# EAGLE board bt_lokomotivy_v1 (EAGLE 6.3)
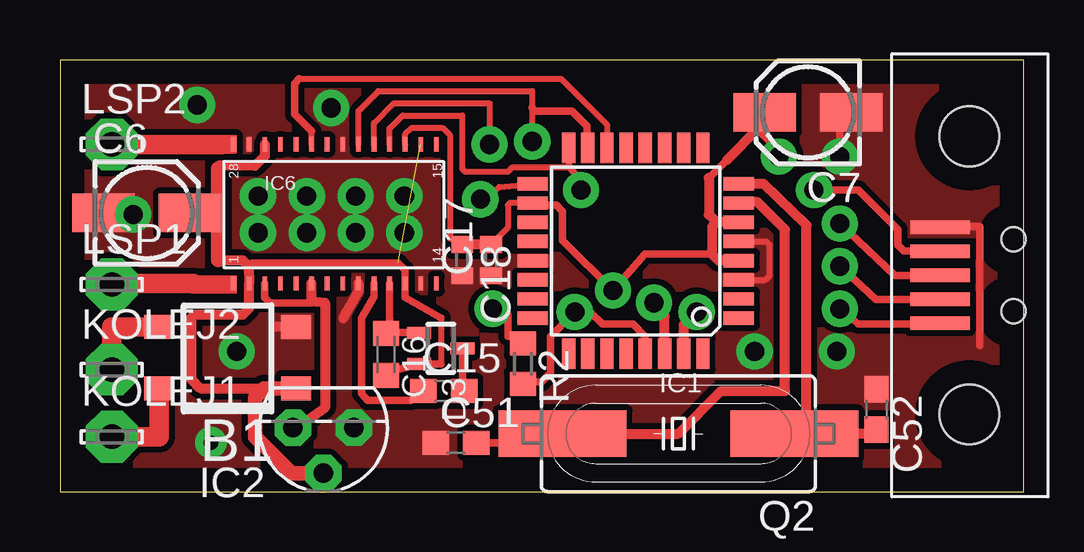
[diagram p0: board, top side]
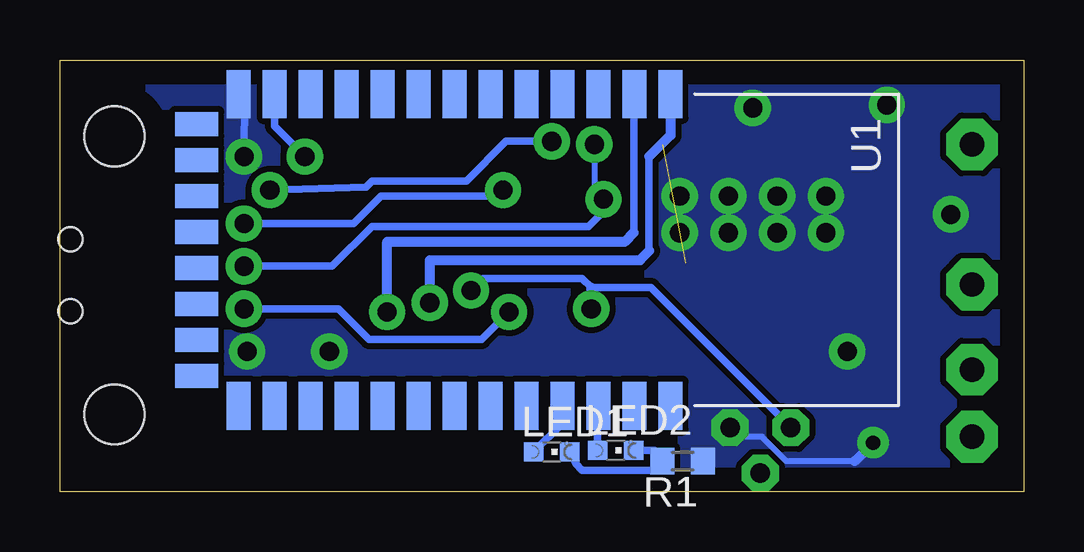
[diagram p1: board, bottom side, seen from below]

Size 40.18 x 18 mm. Coordinates in mm from the lower left corner, seen from the top.
Outline: 0,0 40.18,0 40.18,18 0,18 0,0
Copper layers (1*16): Top 0.035mm / dielectric 1.5mm / Bottom 0.035mm
Design rules "default *": minimum track width 10mil, minimum drill 24mil, track to track 10mil, track to pad 10mil, pad to pad 10mil, via to via 10mil, smd to smd 10mil, copper to edge 1mm, drill to drill 8mil, minimum pad ring 14mil, minimum via ring 14mil, stop-mask expansion 4mil, vias tented up to drill 0mil, thermal gap 10mil
Net classes: 0 default: width 0.15 mm, clearance 0.15 mm; 1 Power: width 0.25 mm, drill 0.381 mm, clearance 0.15 mm

## Footprints (pad centres in the part's own frame; a part is rotated, then mirrored left to right if it is on the bottom)
TO-269AA = smd 1 x 1.25: + -1.28,-2.855; - 1.28,-2.855; AC1 -1.28,2.855; AC2 1.28,2.855
153CLV-0405 = smd 2.6 x 1.6: + 1.8,0; - -1.8,0
C0603 = smd 1.1 x 1: 1 -0.85,0; 2 0.85,0
C0603K = smd 1.05 x 1.08: 1 -0.875,0; 2 0.875,0
C0402 = smd 0.7 x 0.9: 1 -0.65,0; 2 0.65,0
SOT323 = smd 0.5 x 1: 1 0,0.9; 2 -0.65,-0.9; 3 0.65,-0.9
TQFP32-08 = smd 1.27 x 0.559: 1 -4.293,2.8; 2 -4.293,2; 3 -4.293,1.2; 4 -4.293,0.4; 5 -4.293,-0.4; 6 -4.293,-1.2; 7 -4.293,-2; 8 -4.293,-2.8; 17 4.293,-2.8; 18 4.293,-2; 19 4.293,-1.2; 20 4.293,-0.4; 21 4.293,0.4; 22 4.293,1.2; 23 4.293,2; 24 4.293,2.8 | smd 0.559 x 1.27: 9 -2.8,-4.293; 10 -2,-4.293; 11 -1.2,-4.293; 12 -0.4,-4.293; 13 0.4,-4.293; 14 1.2,-4.293; 15 2,-4.293; 16 2.8,-4.293; 25 2.8,4.293; 26 2,4.293; 27 1.2,4.293; 28 0.4,4.293; 29 -0.4,4.293; 30 -1.2,4.293; 31 -2,4.293; 32 -2.8,4.293
TO92 = drill 0.813 pad 1.27 octagon: 1 -1.27,0; 2 0,1.905; 3 1.27,0
HTSSOP28 = smd 0.2 x 0.6: 1 -4.445,-3.26; 2 -3.795,-3.26; 3 -3.145,-3.26; 4 -2.495,-3.26; 5 -1.845,-3.26; 6 -1.195,-3.26; 7 -0.545,-3.26; 8 0.105,-3.26; 9 0.755,-3.26; 10 1.405,-3.26; 11 2.055,-3.26; 12 2.705,-3.26; 13 3.355,-3.26; 14 4.005,-3.26; 15 4.005,2.54; 16 3.355,2.54; 17 2.705,2.54; 18 2.055,2.54; 19 1.405,2.54; 20 0.755,2.54; 21 0.105,2.54; 22 -0.545,2.54; 23 -1.195,2.54; 24 -1.845,2.54; 25 -2.495,2.54; 26 -3.145,2.54; 27 -3.795,2.54; 28 -4.445,2.54
LSP10 = drill 1.016 pad 2.159 octagon: MP 0,0
CHIPLED_0603 = smd 0.8 x 0.8: A 0,-0.75; C 0,0.75
HC49UP = smd 5.334 x 1.93: 1 -4.826,0; 2 4.826,0
R0603 = smd 1 x 1.1: 1 -0.85,0; 2 0.85,0
BLUETOOTH_SMD = smd 2 x 1: 1 0,0; 2 0,-1.5; 3 0,-3; 4 0,-4.5; 5 0,-6; 6 0,-7.5; 7 0,-9; 8 0,-10.5; 9 0,-12; 10 0,-13.5; 11 0,-15; 12 0,-16.5; 13 0,-18; 22 13,-18; 23 13,-16.5; 24 13,-15; 25 13,-13.5; 26 13,-12; 27 13,-10.5; 28 13,-9; 29 13,-7.5; 30 13,-6; 31 13,-4.5; 32 13,-3; 33 13,-1.5; 34 13,0 | smd 1 x 1.8: 14 1.25,-19.75; 15 2.75,-19.75; 16 4.25,-19.75; 17 5.75,-19.75; 18 7.25,-19.75; 19 8.75,-19.75; 20 10.25,-19.75; 21 11.75,-19.75
SEI-5 = smd 0.56 x 2.477: P$1 -2,-1.04; P$2 -1,-1.04; P$3 0,-1.04; P$4 1,-1.04; P$5 2,-1.04 | hole 2.5: -5.8,0.187; 5.8,0.187 | hole 1: -1.5,2.03; 1.5,2.03

## Placement (x,y rotation side)
B1  RECTIFIER-S80  [TO-269AA]  6.99,5.59 90 top
C6  10u  [153CLV-0405]  3.62,11.62 0 top
C7  10u  [153CLV-0405]  31.18,15.81 180 top
C15  10n  [C0603]  16,4.19 0 top
C16  220n  [C0603K]  13.59,5.71 270 top
C17  100n  [C0402]  17.97,9.65 90 top
C18  100n  [C0402]  16.76,9.65 270 top
C51  20pF  [C0603]  16.51,2.03 0 top
C52  20pF  [C0603]  34.04,3.43 270 top
D3  [SOT323]  15.88,5.97 270 top
IC1  MEGA8-AI  [TQFP32-08]  24,10.03 180 top
IC2  HT7533-1 TO92  [TO92]  10.99,2.67 180 top
IC6  L6470  [HTSSOP28]  11.68,11.94 0 top
KOLEJ1  LSP10  [LSP10]  2.16,2.29 0 top
KOLEJ2  LSP10  [LSP10]  2.16,5.08 0 top
LED1  [CHIPLED_0603]  19.68,1.65 270 bottom
LED2  [CHIPLED_0603]  17.02,1.71 270 bottom
LSP1  LSP10  [LSP10]  2.16,8.64 0 top
LSP2  LSP10  [LSP10]  2.16,14.48 0 top
Q2  16MHz  [HC49UP]  25.78,2.41 180 top
R1  [R0603]  14.22,1.27 180 bottom
R2  4k7  [R0603]  19.3,5.33 270 top
U1  HC_05  [BLUETOOTH_SMD]  14.73,16.57 270 bottom
U$2  SEI-5  [SEI-5]  37.72,9.02 270 top

## Library data of the parts
B1 = rectifier
C6 C7 C51 C52 R1 R2 = rcl
C15-C18 = resistor
D3 = zetex; OC_FARNELL: unknown; OC_NEWARK: unknown
IC1 = atmel; MPN: ATMEGA8-16AU; OC_FARNELL: 9171371; OC_NEWARK: 73M8863
IC2 = national-semiconductor; MF: NATIONAL SEMICONDUCTOR; MPN: LM2936Z-3.0/NOPB; OC_FARNELL: 1312709; OC_NEWARK: 41K4531
IC6 = reprap
KOLEJ1 KOLEJ2 LSP1 LSP2 = solpad
LED1 LED2 = led
Q2 = crystal; OC_FARNELL: unknown; OC_NEWARK: unknown
U1 = SerialPortBluetooth
U$2 = con-samtec

## Nets
3V3: C7.+ C17.2 C18.1 IC1.4 IC1.6 IC1.18 IC2.3 IC6.3 IC6.6 IC6.17 R2.1 U1.12
CS: IC1.14 IC6.23
GND [Power]: B1.- C6.- C7.- C17.1 C18.2 C51.1 C52.1 IC1.3 IC1.5 IC1.21 IC2.1 IC6.9 IC6.13 IC6.21 IC6.27 R1.1 U1.13 U$2.P$1
MISO: IC1.16 IC6.18 U$2.P$3
MOSI: IC1.15 IC6.20 U$2.P$2
N$1: IC1.30 U1.1
N$2: LED1.C LED2.C R1.2
N$3: B1.AC1 KOLEJ1.MP
N$4: B1.AC2 KOLEJ2.MP
N$5: IC1.31 U1.2
N$8: IC1.29 R2.2 U$2.P$5
N$9: C51.2 IC1.7 Q2.2
N$10: C52.2 IC1.8 Q2.1
N$12: LED1.A U1.31
N$14: LED2.A U1.32
N$28: C15.1 IC6.10
N$29: C15.2 D3.1
SCK: IC1.17 IC6.19 U$2.P$4
VBOOTX: C16.1 D3.2 IC6.11
VIN: B1.+ C6.+ C16.2 D3.3 IC2.2 IC6.2 IC6.12 IC6.16 IC6.26
X1: IC6.1 LSP1.MP
X2: IC6.28 LSP2.MP

## Tracks (layer width: path | path; a pad name or v marks a point on that pad's centre or on a via)
3V3  (via drill 0.8)
  Top 0.254: IC6.17 14.39,14.9 14.67,15.18 15.94,15.18 16.26,14.86 16.26,10.56 C18.1 | IC1.18 18.76,12.03 18.67,11.94 18.67,11 C17.2
  Top 0.305: IC6.3 8.54,8.1 8.76,7.87 10.44,7.87 10.49,7.93 | 27.81,13.84 27.05,13.08 | 27.18,9.91 24.38,9.91 v23.05,8.38 20.95,10.48 20.95,11.68 20.7,11.94 19.8,11.94 IC1.18 | C7.+ 29.4,15.81 29.46,15.75 | v29.97,13.97 29.97,14.22 29.08,15.11 | v18.03,7.62 18.67,7.37 18.67,6.48 19.01,6.48 R2.1
  Top 0.406: IC6.6 10.49,7.93 11.05,7.87 11.05,3.49 9.91,2.67 | C17.2 C18.1 | IC1.4 27.45,9.63 27.18,9.91 27.18,11.05 27.36,11.23 | IC1.6 27.36,11.23 | C7.+ 29.38,15.41 29.08,15.11 27.81,13.84 | 27.05,13.08 27.05,11.54 27.36,11.23
  Top 0.61: IC2.3 9.91,2.67 10.16,2.67
  Bottom 0.305: IC2.3 15.56,8.51 18.03,8.51 18.41,8.89 22.54,8.89 v23.05,8.38 | U1.12 31.23,15.23 v29.97,13.97
  Bottom 0.406: v18.03,7.62 18.03,8.51
CS
  Top 0.254: IC6.23 10.49,15.04 | 9.97,17.21 20.89,17.21 22.8,15.3 IC1.14
  Top 0.305: 9.97,17.21 9.78,17.02 9.78,15.75 10.49,15.04
GND  (via drill 0.6, 0.8)
  Top 0.254: IC1.3 29.41,8.83 29.59,9.02 29.59,10.29 29.46,10.41 28.32,10.41 IC1.5
  Top 0.305: 37.85,11.05 38.35,11.05 38.35,6.1 | v32.51,13.97 32.51,15.35 C7.-
  Top 0.406: 11.81,7.24 12.44,8.38 IC6.9 | B1.- 8.9,6.87
  Bottom 0.254: 7.05,1.27 9.91,1.27 10.92,2.29 11.94,2.29
  Bottom 0.305: U1.13 32.48,16.54 v32.51,13.97
  Bottom 0.406: v6.29,2.03 7.05,1.27 | 11.94,2.29 IC2.1
  other vias: 7.37,5.84 8.26,12.32 8.26,10.79 10.29,10.79 10.29,12.32 12.32,12.32 12.32,10.79 14.35,10.79 14.35,12.32 5.71,16.13 11.3,16 3.05,11.56 28.96,5.84 32.38,5.84
  pour Top (no thermals): 0,18.03 41.02,18.16 41.02,0.13 0,0
  pour Bottom (no thermals): 0,0 0,18.03 41.02,18.16 41.02,0.13
MISO  (via drill 0.8)
  Top 0.254: IC6.18 13.74,15.14 14.29,15.68 16.76,15.68 16.76,13.46 16.89,13.34 18.67,13.34 18.86,13.53 21.24,13.53 IC1.16
  Top 0.305: v21.72,12.57 21.72,12.92 21.24,13.53 | U$2.P$3 34.8,9.02 v32.51,11.18
  Bottom 0.305: v32.51,11.18 27.94,11.18 26.8,12.32 21.97,12.32 v21.72,12.57
MOSI  (via drill 0.8)
  Top 0.254: IC6.20 12.44,15.87 13.27,16.7 19.68,16.7 19.68,16 v19.68,14.61 | 21.97,14.36 IC1.15 | 36.66,10.03 U$2.P$2
  Top 0.305: 21.97,14.36 21.97,15.24 21.34,15.88 19.81,15.88 19.68,16 | 36.66,10.03 35.18,10.03 34.92,10.29 34.92,10.92 33.27,12.57 v31.43,12.57
  Bottom 0.305: v31.43,12.57 27.43,12.7 27.18,12.95 23.24,12.95 21.59,14.61 v19.68,14.61
N$1  (via drill 0.8)
  Top 0.406: IC1.30 25.2,7.31 v24.77,7.87
  Bottom 0.305: 15.62,13.97 15.62,10.03
  Bottom 0.406: v24.77,7.87 24.77,9.65 16,9.65 15.62,10.03 | U1.1 14.73,14.86 15.62,13.97
N$2
  Bottom 0.305: LED1.C 18.68,1.16 18.41,0.89 15.33,0.89 R1.2 15.39,1.71 LED2.C
N$3
  Top 0.813: B1.AC1 4.13,2.29 KOLEJ1.MP
N$4
  Top 0.813: B1.AC2 2.16,6.87 KOLEJ2.MP
N$5  (via drill 0.8)
  Top 0.406: IC1.31 26,6.95 v26.54,7.49
  Bottom 0.305: 16.26,16.55 16.26,10.79
  Bottom 0.406: v26.54,7.49 26.54,10.41 16.64,10.41 16.26,10.79 | 16.26,16.55 U1.2
N$8  (via drill 0.8)
  Top 0.305: U$2.P$5 36.65,6.99 33.27,6.99 v32.51,7.62 | IC1.29 24.38,5.76 24.38,6.48 23.88,6.99 22.61,6.99 22.1,7.49 v21.46,7.49 20.45,6.48 20.45,4.95 20.07,4.57 19.39,4.57 R2.2
  Bottom 0.305: v32.51,7.62 28.57,7.62 27.3,6.35 22.61,6.35 v21.46,7.49
N$9
  Top 0.305: C51.2 20.57,2.03 Q2.2
  Top 0.406: Q2.2 25.78,2.41 27.56,4.19 30.23,4.19 30.23,10.92 29.08,12.06 28.33,12.06 IC1.7
N$10
  Top 0.406: Q2.1 31.11,2.41 | 31.11,2.41 31.11,11.11 29.34,12.83 IC1.8 | C52.2 33.91,2.41 31.11,2.41
N$12
  Bottom 0.305: U1.31 19.23,2.85 LED1.A
N$14
  Bottom 0.305: U1.32 17.77,3.23 LED2.A
N$28
  Top 0.305: IC6.10 13.09,8.14 12.57,7.24 12.57,4.1 12.83,3.81 14.64,3.81 C15.1
N$29
  Top 0.305: D3.1 16.77,4.5 C15.2
SCK  (via drill 0.8)
  Top 0.254: IC6.19 13.09,15.38 13.91,16.19 17.91,16.19 v17.91,14.48 | IC1.17 18.32,12.7 v17.53,12.19
  Top 0.305: U$2.P$4 34.02,8.02 v32.51,9.4
  Bottom 0.254: v17.91,14.48 17.91,12.57 v17.53,12.19
  Bottom 0.305: v32.51,9.4 28.83,9.4 27.18,11.05 18.16,11.05 17.53,11.68 v17.53,12.19
VBOOTX
  Top 0.305: IC6.11 13.74,6.83 | D3.2 14.99,6.63 13.5,6.63 C16.1
  Top 0.406: 13.74,6.83 13.74,6.74 C16.1
VIN  (1 unrouted)
  Top 0.254: 15.88,7.24 15.88,5.33
  Top 0.305: 7.87,9.4 8,9.53 14.1,9.53 14.39,9.23 IC6.12 14.39,8.09 15.88,7.24 | 15.88,5.33 D3.3 13.61,4.97 C16.2 | C6.+ 6.54,11.62 6.6,11.56
  Top 0.406: IC6.26 8.54,14 8.13,13.59 6.6,13.59 6.6,13.46 | 6.6,9.65 7.62,9.65 7.87,9.4 IC6.2 7.87,8.66 7.87,7.62 7.62,7.37 5.59,7.37 5.46,7.24 5.46,4.7 5.85,4.31 8.51,4.31
  Top 0.61: 6.6,13.46 6.6,11.56 6.6,9.65 | IC2.2 9.65,0.76 8.13,2.29 8.13,3.93 8.51,4.31 B1.+
X1
  Top 0.254: 5.55,8.68 IC6.1
  Top 0.813: 5.55,8.68 2.24,8.68 LSP1.MP
X2
  Top 0.254: 6.73,14.48 IC6.28
  Top 0.813: 6.73,14.48 LSP2.MP
(copper drawn outside any net)
  shapes: Top area x2